# Altium PCB XT60_Bus.PcbDoc
Units mil, origin at the board's own origin, x right, y up, seen from the top; angles counter-clockwise.
Board outline 3850 x 650 mil, 2 copper layers (Top Layer, Bottom Layer), stack 59.8 mil thick; 21 components, 2 nets, 42 pads, 0 vias.
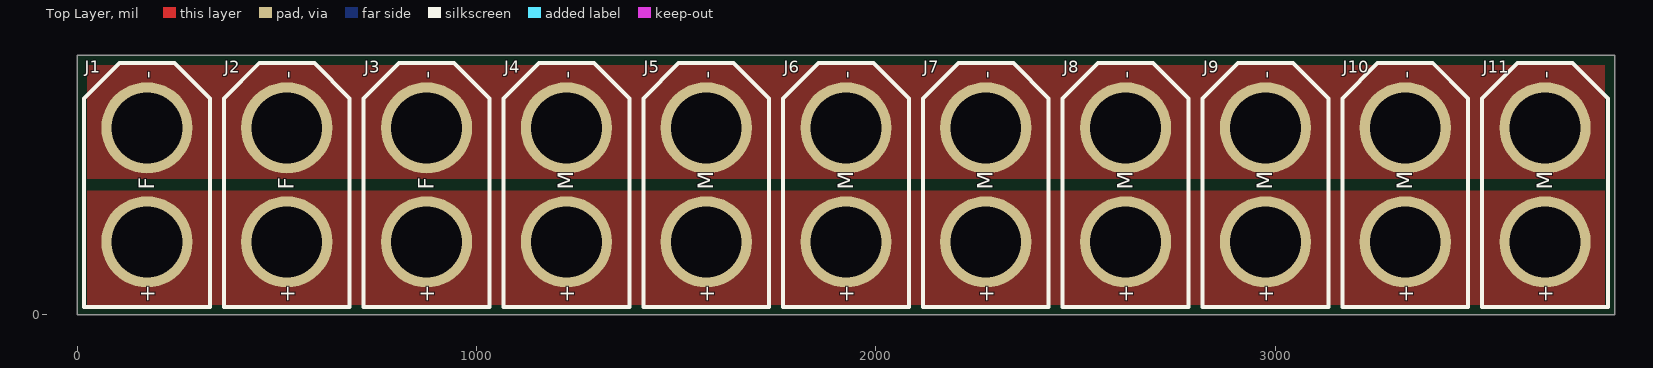
[diagram p0: Top Layer view]
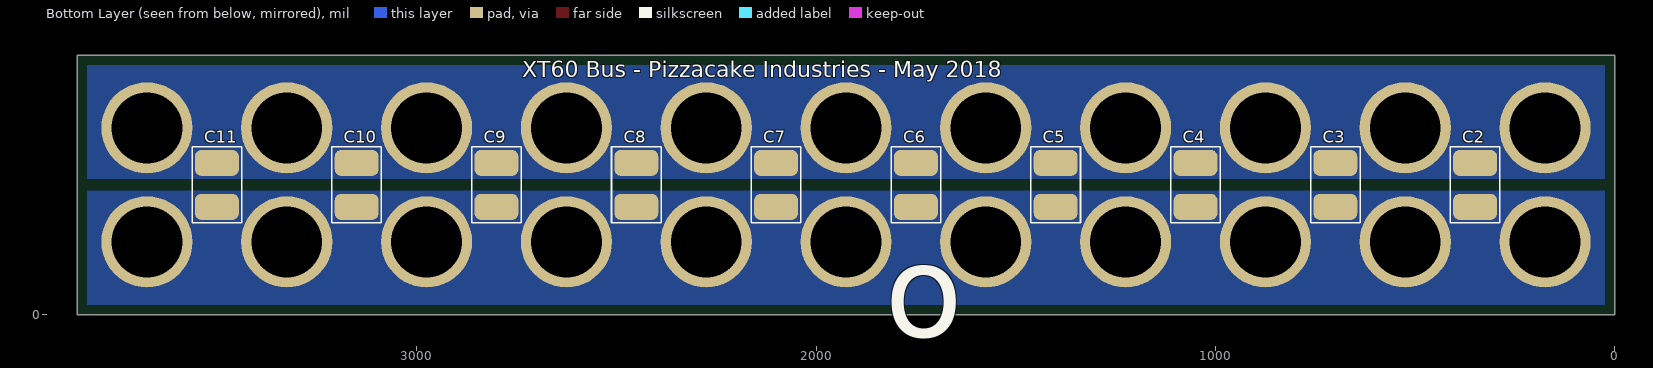
[diagram p1: Bottom Layer view, seen from below]

## Layer stack, top to bottom
Top Solder: solder mask 0.4, Solder Resist, Dk 3.5
Top Layer: signal copper 1.4
Dielectric 1: dielectric 57, FR-4, Dk 4.8
Bottom Layer: signal copper 1.4
Bottom Solder: solder mask 0.4, Solder Resist, Dk 3.5

## Board outline
0,0 3850,0 3850,650 0,650

## Design rules (kind name [scope] priority, off if disabled: settings)
Clearance Clearance_HV [InNetClass('HV') vs NOT ((OnLayer('Top Overlay') OR OnLayer('Bottom Overlay')))] p1: gap=50 ignorepadtopadclearanceinfootprint=FALSE except(0: Arc-Hole Track-Hole SMDPad-Hole THPad-Hole Via-Hole Fill-Hole Poly-Hole Region-Hole Text-Hole; 40: THPad-THPad)
Clearance Clearance_MV [InNetClass('MV') vs NOT ((OnLayer('Top Overlay') OR OnLayer('Bottom Overlay')))] p2: gap=20 ignorepadtopadclearanceinfootprint=FALSE except(0: Arc-Hole Track-Hole SMDPad-Hole THPad-Hole Via-Hole Fill-Hole Poly-Hole Region-Hole Text-Hole)
Clearance "Polygon Clearance" [InPoly] p3: gap=16 ignorepadtopadclearanceinfootprint=FALSE except(0: Arc-Hole Track-Hole SMDPad-Hole THPad-Hole Via-Hole Fill-Hole Poly-Hole Region-Hole Text-Hole)
Clearance [NOT ((OnLayer('Top Overlay') OR OnLayer('Bottom Overlay')))] p4: gap=7.5 ignorepadtopadclearanceinfootprint=FALSE except(0: Arc-Hole Track-Hole SMDPad-Hole THPad-Hole Via-Hole Fill-Hole Poly-Hole Region-Hole Text-Hole)
DiffPairsRouting [All] p1: maxlimit=12 minlimit=7.5 mostfreqgap=7.5 toplayer_minwidth=6 toplayer_maxwidth=12 toplayer_prefwidth=10 bottomlayer_minwidth=6 bottomlayer_maxwidth=12 bottomlayer_prefwidth=10 maxuncoupledlength=500
HoleSize [All] p1: absolutevalues=TRUE maxlimit=250 minlimit=15 maxpercent=80.000 minpercent=20.000
MinimumSolderMaskSliver [All] p1 off: minsoldermaskwidth=4
PlaneClearance PlaneClearance_HV [InNetClass('HV')] p1: clearance=50
PlaneClearance PlaneClearance_MV [InNetClass('MV')] p2: clearance=30
PlaneClearance [All] p3: clearance=20
PlaneConnect [All] p1: planeconnectstyle=Relief reliefexpansion=10 reliefentries=4 reliefconductorwidth=12 reliefairgap=6
PolygonConnect PolygonConnectVias [IsVia] p1: connectstyle=Direct reliefconductorwidth=10 reliefentries=4 polygonreliefangle="90 Angle" airgapwidth=10
PolygonConnect [All] p2: connectstyle=Direct reliefconductorwidth=12 reliefentries=4 polygonreliefangle="90 Angle" airgapwidth=7.5
RoutingVias [All] p1: holewidth=15 width=30 viastyle="Through Hole" minholewidth=15 minwidth=20 maxholewidth=250 maxwidth=500
SMDNeckDown [All] p1: percent=100.000
SilkToSilkClearance [All] p1 off: silktosilkclearance=10
SilkToSolderMaskClearance [IsPad] p1: minsilkscreentomaskgap=6 clearancetoexposedcopper=TRUE
SolderMaskExpansion [All] p1: expansion=4
ViasUnderSMD [All] p1: allowed=FALSE
Width [All] p1: maxlimit=1000 minlimit=6 preferedwidth=10 minimp=50.000000 maximp=50.000000 favimp=50.000000 checkconnectedcopper=TRUE
23 further rules are at their usual default settings.

## Components (designator, comment, footprint, x,y, rotation, side; value= is the part's Value field where it differs from the comment)
C2 "C_1210_10uF" 1210_Capacitor 350,325 r270 bottom value=10uF
C3 "C_1210_10uF" 1210_Capacitor 700,325 r270 bottom value=10uF
C4 "C_1210_10uF" 1210_Capacitor 1050,325 r90 bottom value=10uF
C5 "C_1210_10uF" 1210_Capacitor 1400,325 r90 bottom value=10uF
C6 "C_1210_10uF" 1210_Capacitor 1750,325 r90 bottom value=10uF
C7 "C_1210_10uF" 1210_Capacitor 2100,325 r90 bottom value=10uF
C8 "C_1210_10uF" 1210_Capacitor 2450,325 r90 bottom value=10uF
C9 "C_1210_10uF" 1210_Capacitor 2800,325 r90 bottom value=10uF
C10 "C_1210_10uF" 1210_Capacitor 3150,325 r90 bottom value=10uF
C11 "C_1210_10uF" 1210_Capacitor 3500,325 r90 bottom value=10uF
J1 "XT60" J_XT60_Thru_Female 175,325 r90 top
J2 "XT60" J_XT60_Thru_Female 525,325 r90 top
J3 "XT60" J_XT60_Thru_Female 875,325 r90 top
J4 "XT60" J_XT60_Thru_Male 1225,325 r90 top
J5 "XT60" J_XT60_Thru_Male 1575,325 r90 top
J6 "XT60" J_XT60_Thru_Male 1925,325 r90 top
J7 "XT60" J_XT60_Thru_Male 2275,325 r90 top
J8 "XT60" J_XT60_Thru_Male 2625,325 r90 top
J9 "XT60" J_XT60_Thru_Male 2975,325 r90 top
J10 "XT60" J_XT60_Thru_Male 3325,325 r90 top
J11 "XT60" J_XT60_Thru_Male 3675,325 r90 top

## Footprints (in the part's own frame and the unit in brackets; to place one, negate y for a bottom-side part, rotate by r counter-clockwise, add the part's x,y. Pads: shape width x height; smd on the part's side, far side on the other; paste and mask are expansions set on the pad)
1210_Capacitor [mil] "1210 Capacitor"
  rrect50% 65x110 smd: 1(-55,0) 2(55,0)
  silkscreen extent -95,-62 95,62, body extent -84,-54 82,52, height 36
J_XT60_Thru_Female [mm]
  round 5.8 hole 4.5: 1(-3.625,0) 2(3.625,0)
  silkscreen extent -7.75,-4 7.75,4, body extent -7.77,-4.07 8.13,4.08, height 17.21
J_XT60_Thru_Male [mm]
  round 5.8 hole 4.5: 1(-3.625,0) 2(3.625,0)
  silkscreen extent -7.75,-4 7.75,4, body extent -7.77,-4.07 8.13,4.08, height 16.21

## Part data
C2 C3 C4 C5 C6 C7 C8 C9 C10 C11: "CAP CER 10UF 50V 10% X5R 1210", Manufacturer="Taiyo Yuden", Manufacturer PN=UMK325BJ106KM-T, Package=1210, Supplier Part Number 1=587-2247-1-ND, Supplier 1=Digi-Key, SVP Creator="Matt Rogge"
J1 J2 J3 J4 J5 J6 J7 J8 J9 J10 J11: library part J_XT60, "60 Amp XT60 Connector"

## Nets (pads, with @x,y where several pads share a name; then routed paths per layer and width w, separated by ;. In a path a pad name is that pad's centre, name@x,y a point inside that pad or via, vN(x,y) a via of type N, cw(c..) or ccw(c..) an arc to the next point about the centre after c; other vN are vias at no path point)
GND: C2.1 C3.1 C4.2 C5.2 C6.2 C7.2 C8.2 C9.2 C10.2 C11.2 J1.2 J2.2 J3.2 J4.2 J5.2 J6.2 J7.2 J8.2 J9.2 J10.2 J11.2
VBUS: C2.2 C3.2 C4.1 C5.1 C6.1 C7.1 C8.1 C9.1 C10.1 C11.1 J1.1 J2.1 J3.1 J4.1 J5.1 J6.1 J7.1 J8.1 J9.1 J10.1 J11.1

## Polygon pours and split planes (outlines as drawn)
VBUS on Top Layer "AutoNaming" (solid, pour order 4): 25,310 25,25 3825,25 3825,310
GND on Top Layer "AutoNaming" (solid, pour order 2): 25,340 25,625 3825,625 3825,340
VBUS on Bottom Layer "AutoNaming" (solid, pour order 8): 25,310 25,25 3825,25 3825,310
GND on Bottom Layer "AutoNaming" (solid, pour order 6): 25,340 25,625 3825,625 3825,340

## Silkscreen, mask and mechanical layers (free items; w line width, h text height)
Bottom Overlay:
  text "XT60 Bus - Pizzacake Industries - May 2018" at 2735,595 h40
  text "o" at 1828,-131 h400
Mechanical 1:
  the board outline again, w10

## Text inside footprints (layer, text, board x,y; h text height)
J1: Top Overlay "-" at 194.69,590.75 h39.37 r90; Top Overlay "+" at 194.69,29.72 h39.37 r90; Top Overlay "F" at 192.7,312.2 h39.37 r90
J2: Top Overlay "-" at 544.69,590.75 h39.37 r90; Top Overlay "+" at 544.69,29.72 h39.37 r90; Top Overlay "F" at 542.7,312.2 h39.37 r90
J3: Top Overlay "-" at 894.68,590.75 h39.37 r90; Top Overlay "+" at 894.68,29.72 h39.37 r90; Top Overlay "F" at 892.7,312.2 h39.37 r90
J4: Top Overlay "M" at 1242.7,312.2 h39.37 r90; Top Overlay "-" at 1244.68,590.75 h39.37 r90; Top Overlay "+" at 1244.68,29.72 h39.37 r90
J5: Top Overlay "M" at 1592.7,312.2 h39.37 r90; Top Overlay "-" at 1594.68,590.75 h39.37 r90; Top Overlay "+" at 1594.68,29.72 h39.37 r90
J6: Top Overlay "M" at 1942.7,312.2 h39.37 r90; Top Overlay "-" at 1944.68,590.75 h39.37 r90; Top Overlay "+" at 1944.68,29.72 h39.37 r90
J7: Top Overlay "M" at 2292.7,312.2 h39.37 r90; Top Overlay "-" at 2294.68,590.75 h39.37 r90; Top Overlay "+" at 2294.68,29.72 h39.37 r90
J8: Top Overlay "M" at 2642.7,312.2 h39.37 r90; Top Overlay "-" at 2644.68,590.75 h39.37 r90; Top Overlay "+" at 2644.68,29.72 h39.37 r90
J9: Top Overlay "M" at 2992.7,312.2 h39.37 r90; Top Overlay "-" at 2994.68,590.75 h39.37 r90; Top Overlay "+" at 2994.68,29.72 h39.37 r90
J10: Top Overlay "M" at 3342.7,312.2 h39.37 r90; Top Overlay "-" at 3344.68,590.75 h39.37 r90; Top Overlay "+" at 3344.68,29.72 h39.37 r90
J11: Top Overlay "M" at 3692.7,312.2 h39.37 r90; Top Overlay "-" at 3694.68,590.75 h39.37 r90; Top Overlay "+" at 3694.68,29.72 h39.37 r90